# EAGLE board Qwiic-OpenLog_Panel (EAGLE 7.7.0), part 1 of 2
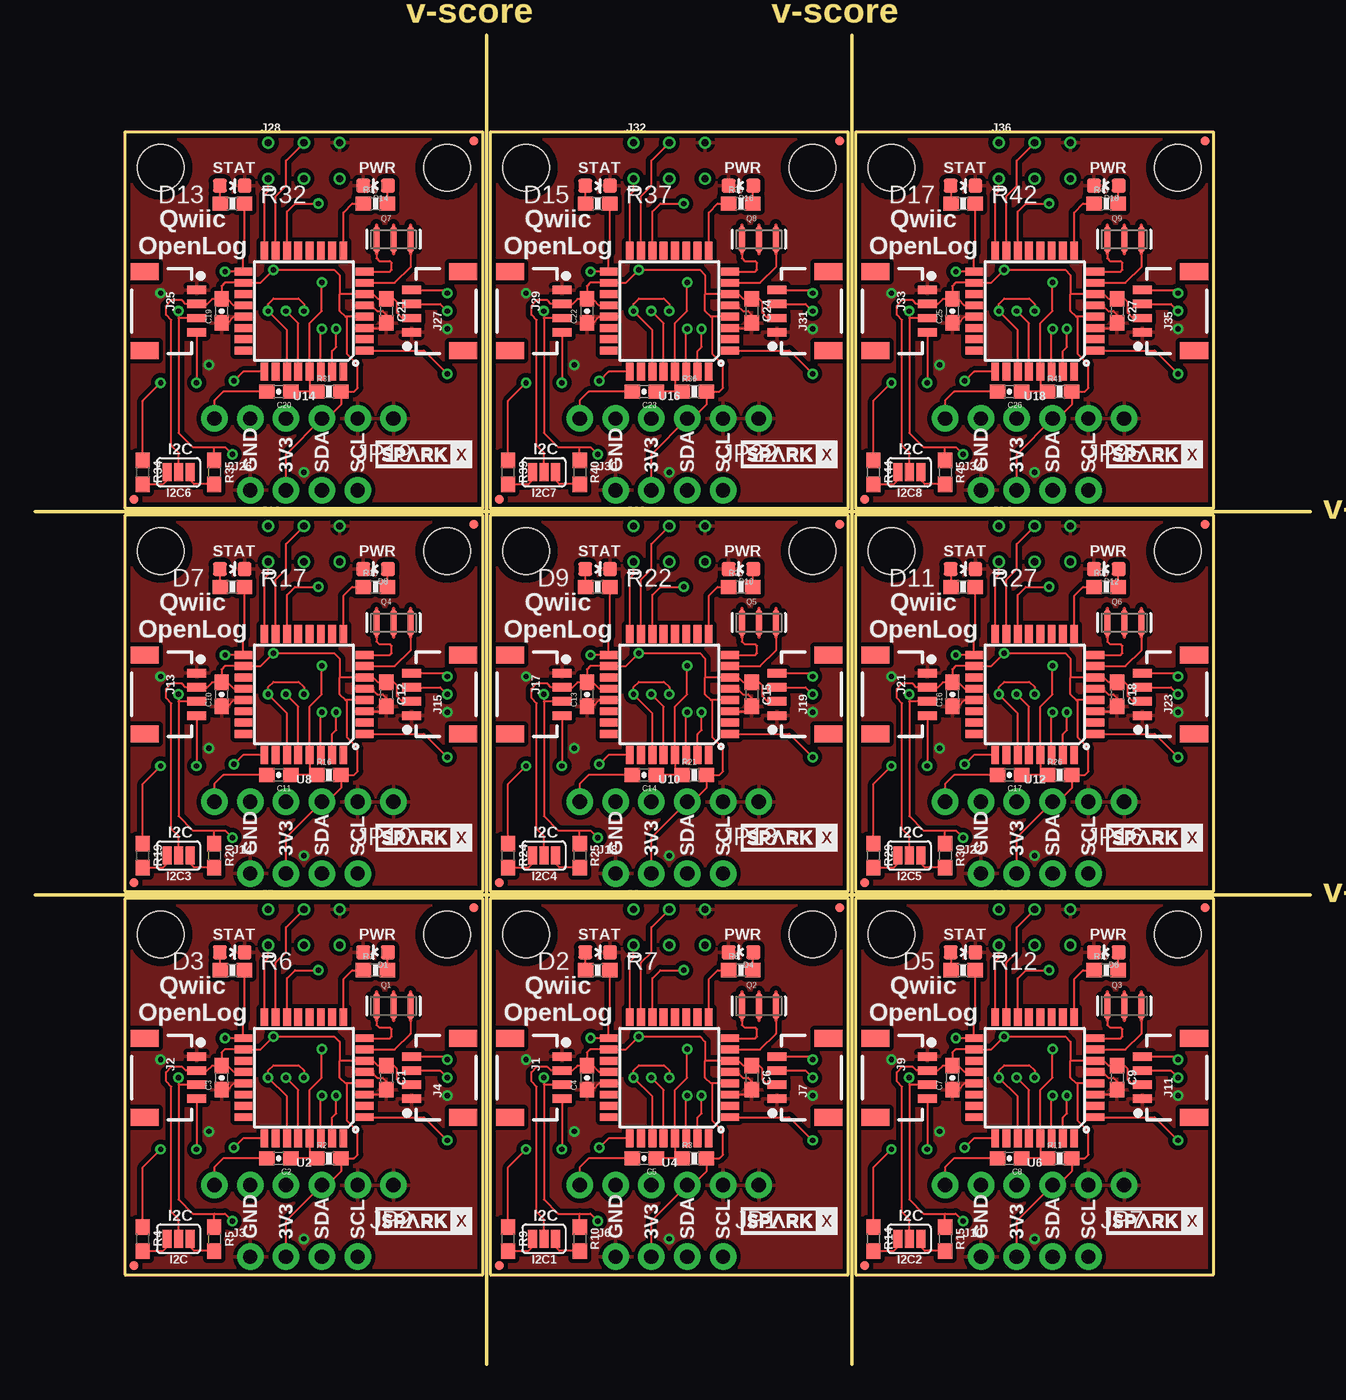
[diagram p0: board, top side]
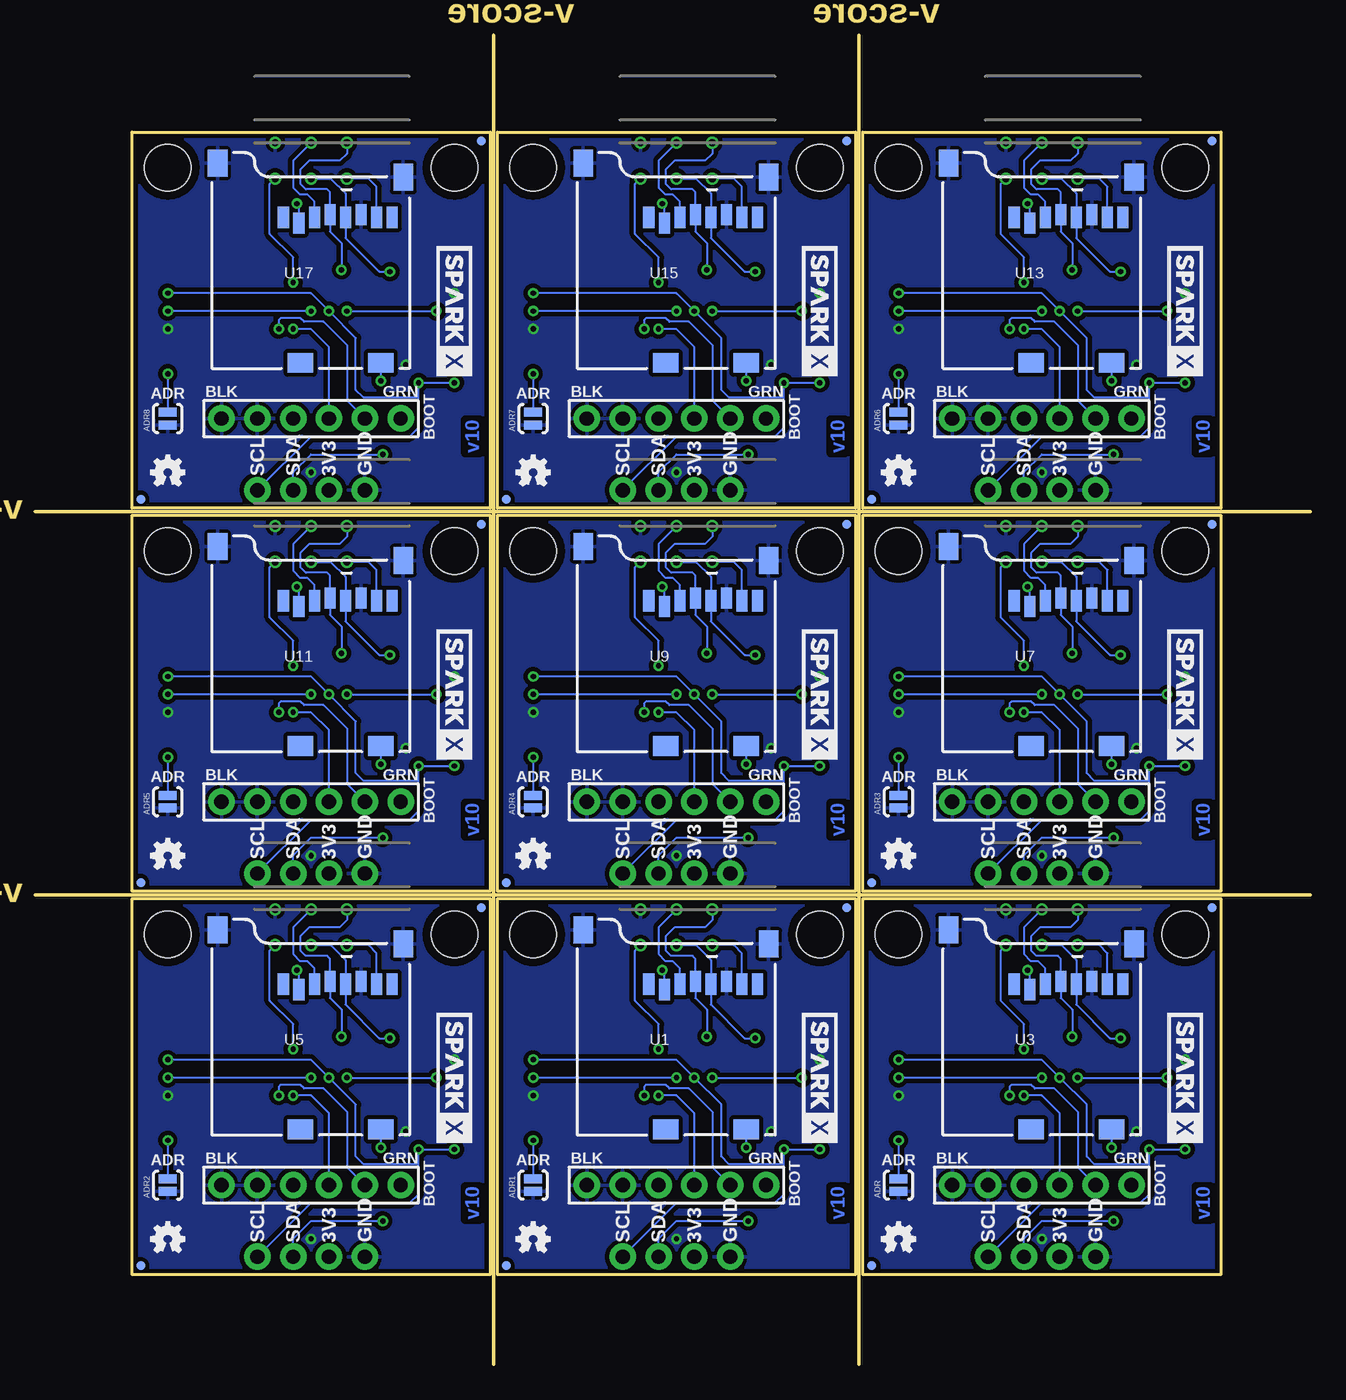
[diagram p1: board, bottom side, seen from below]

Size 90.42 x 94.23 mm. Coordinates in mm from the lower left corner, seen from the top.
Outline: 32,0 32,94.23
Outline: 57.91,0 57.91,94.23
Outline: 0,33.27 90.42,33.27
Outline: 0,60.45 90.42,60.45
Outline: 31.75,6.35 31.75,33.02 6.35,33.02 6.35,6.35 31.75,6.35
Outline: 57.66,6.35 57.66,33.02 32.26,33.02 32.26,6.35 57.66,6.35
Outline: 83.57,6.35 83.57,33.02 58.17,33.02 58.17,6.35 83.57,6.35
Outline: 31.75,33.53 31.75,60.2 6.35,60.2 6.35,33.53 31.75,33.53
Outline: 57.66,33.53 57.66,60.2 32.26,60.2 32.26,33.53 57.66,33.53
Outline: 83.57,33.53 83.57,60.2 58.17,60.2 58.17,33.53 83.57,33.53
Outline: 31.75,60.71 31.75,87.38 6.35,87.38 6.35,60.71 31.75,60.71
Outline: 57.66,60.71 57.66,87.38 32.26,87.38 32.26,60.71 57.66,60.71
Outline: 83.57,60.71 83.57,87.38 58.17,87.38 58.17,60.71 83.57,60.71
Copper layers (1*16): Top 0.035mm / dielectric 1.5mm / Bottom 0.035mm
Design rules "SparkFun-2-layer-PCBWay-LIMIT": minimum track width 6mil, minimum drill 0.3mm, track to track 6mil, track to pad 6mil, pad to pad 6mil, via to via 6mil, smd to smd 6mil, copper to edge 6mil, drill to drill 6mil, minimum pad ring 7mil, minimum via ring 7mil, stop-mask expansion 4mil, vias tented up to drill 25mil, thermal gap 10mil
Net classes: 1 vcc: width 0.152 mm

## Footprints (pad centres in the part's own frame; a part is rotated, then mirrored left to right if it is on the bottom)
SJ_2S-NO = smd 0.635 x 1.27: 1 -0.45,0; 2 0.45,0
0603 = smd 1.1 x 1: 1 -0.85,0; 2 0.85,0
0603-CAP = smd 1.1 x 1: 1 -0.85,0; 2 0.85,0
LED-0603 = smd 1 x 1: A 0,-0.877; C 0,0.877
MICRO-FIDUCIAL = smd 0.635 x 0.635: 1 0,0
SMT-JUMPER_3_2-NC_PASTE_SILK = smd 0.635 x 1.27: 1 -0.813,0; 2 0,0; 3 0.813,0
1X04_1MM_RA = smd 0.6 x 1.35: 1 -1.5,0; 2 -0.5,0; 3 0.5,0; 4 1.5,0 | smd 1.2 x 2: NC1 2.8,-3.675; NC2 -2.8,-3.675
1X04_NO_SILK = drill 1.016 pad 1.88: 1 0,0; 2 2.54,0; 3 5.08,0; 4 7.62,0
2X3_TEST_POINTS = drill 0.508: 1 -2.54,-1.27; 2 -2.54,1.27; 3 0,-1.27; 4 0,1.27; 5 2.54,-1.27; 6 2.54,1.27
1X06_NO_SILK = drill 1.016 pad 1.88: 1 0,0; 2 2.54,0; 3 5.08,0; 4 7.62,0; 5 10.16,0; 6 12.7,0
STAND-OFF = hole 3.302: 0,0
RESONATOR-SMD = smd 0.45 x 1.905: 1 -1.2,0; 2 0,0; 3 1.2,0
0603-RES = smd 1.1 x 1: 1 -0.85,0; 2 0.85,0
MICRO-SD-SOCKET-PP = smd 1.8 x 1.4: CD1 -2.05,0.4; CD2 -7.75,0.4 | smd 0.8 x 1.5: CS -7.84,10.3; DI -6.74,10.7; DO -2.34,10.7; GND -3.44,10.9; RSV1 -8.94,10.7; RSV2 -1.24,10.7; SCLK -4.54,10.7; VCC -5.64,10.9 | smd 1.4 x 1.9: GND1 -13.6,14.55; GND3 -0.45,13.55
TQFP32-08 = smd 1.27 x 0.559: 1 -4.293,2.8; 2 -4.293,2; 3 -4.293,1.2; 4 -4.293,0.4; 5 -4.293,-0.4; 6 -4.293,-1.2; 7 -4.293,-2; 8 -4.293,-2.8; 17 4.293,-2.8; 18 4.293,-2; 19 4.293,-1.2; 20 4.293,-0.4; 21 4.293,0.4; 22 4.293,1.2; 23 4.293,2; 24 4.293,2.8 | smd 0.559 x 1.27: 9 -2.8,-4.293; 10 -2,-4.293; 11 -1.2,-4.293; 12 -0.4,-4.293; 13 0.4,-4.293; 14 1.2,-4.293; 15 2,-4.293; 16 2.8,-4.293; 25 2.8,4.293; 26 2,4.293; 27 1.2,4.293; 28 0.4,4.293; 29 -0.4,4.293; 30 -1.2,4.293; 31 -2,4.293; 32 -2.8,4.293

## Placement (x,y rotation side)
ADR  [SJ_2S-NO]  29.21,12.7 90 bottom
ADR1  [SJ_2S-NO]  55.12,12.7 90 bottom
ADR2  [SJ_2S-NO]  81.03,12.7 90 bottom
ADR3  [SJ_2S-NO]  29.21,39.88 90 bottom
ADR4  [SJ_2S-NO]  55.12,39.88 90 bottom
ADR5  [SJ_2S-NO]  81.03,39.88 90 bottom
ADR6  [SJ_2S-NO]  29.21,67.06 90 bottom
ADR7  [SJ_2S-NO]  55.12,67.06 90 bottom
ADR8  [SJ_2S-NO]  81.03,67.06 90 bottom
C1  4.7uF  [0603]  24.89,20.32 270 top
C2  0.1uF  [0603-CAP]  17.27,14.61 180 top
C3  0.1uF  [0603-CAP]  13.21,20.32 90 top
C4  0.1uF  [0603-CAP]  39.12,20.32 90 top
C5  0.1uF  [0603-CAP]  43.18,14.61 180 top
C6  4.7uF  [0603]  50.8,20.32 270 top
C7  0.1uF  [0603-CAP]  65.02,20.32 90 top
C8  0.1uF  [0603-CAP]  69.09,14.61 180 top
C9  4.7uF  [0603]  76.71,20.32 270 top
C10  0.1uF  [0603-CAP]  13.21,47.5 90 top
C11  0.1uF  [0603-CAP]  17.27,41.78 180 top
C12  4.7uF  [0603]  24.89,47.5 270 top
C13  0.1uF  [0603-CAP]  39.12,47.5 90 top
C14  0.1uF  [0603-CAP]  43.18,41.78 180 top
C15  4.7uF  [0603]  50.8,47.5 270 top
C16  0.1uF  [0603-CAP]  65.02,47.5 90 top
C17  0.1uF  [0603-CAP]  69.09,41.78 180 top
C18  4.7uF  [0603]  76.71,47.5 270 top
C19  0.1uF  [0603-CAP]  13.21,74.68 90 top
C20  0.1uF  [0603-CAP]  17.27,68.96 180 top
C21  4.7uF  [0603]  24.89,74.68 270 top
C22  0.1uF  [0603-CAP]  39.12,74.68 90 top
C23  0.1uF  [0603-CAP]  43.18,68.96 180 top
C24  4.7uF  [0603]  50.8,74.68 270 top
C25  0.1uF  [0603-CAP]  65.02,74.68 90 top
C26  0.1uF  [0603-CAP]  69.09,68.96 180 top
C27  4.7uF  [0603]  76.71,74.68 270 top
D1  RED  [LED-0603]  24.13,29.21 90 top
D2  GREEN  [LED-0603]  39.88,29.21 270 top
D3  GREEN  [LED-0603]  13.97,29.21 270 top
D4  RED  [LED-0603]  50.04,29.21 90 top
D5  GREEN  [LED-0603]  65.79,29.21 270 top
D6  RED  [LED-0603]  75.95,29.21 90 top
D7  GREEN  [LED-0603]  13.97,56.39 270 top
D8  RED  [LED-0603]  24.13,56.39 90 top
D9  GREEN  [LED-0603]  39.88,56.39 270 top
D10  RED  [LED-0603]  50.04,56.39 90 top
D11  GREEN  [LED-0603]  65.79,56.39 270 top
D12  RED  [LED-0603]  75.95,56.39 90 top
D13  GREEN  [LED-0603]  13.97,83.57 270 top
D14  RED  [LED-0603]  24.13,83.57 90 top
D15  GREEN  [LED-0603]  39.88,83.57 270 top
D16  RED  [LED-0603]  50.04,83.57 90 top
D17  GREEN  [LED-0603]  65.79,83.57 270 top
D18  RED  [LED-0603]  75.95,83.57 90 top
FID1  FIDUCIALUFIDUCIAL  [MICRO-FIDUCIAL]  31.12,32.38 0 top
FID2  FIDUCIALUFIDUCIAL  [MICRO-FIDUCIAL]  6.98,6.98 0 top
FID3  FIDUCIALUFIDUCIAL  [MICRO-FIDUCIAL]  31.12,6.98 180 bottom
FID4  FIDUCIALUFIDUCIAL  [MICRO-FIDUCIAL]  6.98,32.38 0 bottom
FID5  FIDUCIALUFIDUCIAL  [MICRO-FIDUCIAL]  57.02,32.38 0 top
FID6  FIDUCIALUFIDUCIAL  [MICRO-FIDUCIAL]  32.89,6.98 0 top
FID7  FIDUCIALUFIDUCIAL  [MICRO-FIDUCIAL]  57.02,6.98 180 bottom
FID8  FIDUCIALUFIDUCIAL  [MICRO-FIDUCIAL]  32.89,32.38 0 bottom
FID9  FIDUCIALUFIDUCIAL  [MICRO-FIDUCIAL]  82.93,32.38 0 top
FID10  FIDUCIALUFIDUCIAL  [MICRO-FIDUCIAL]  58.8,6.98 0 top
FID11  FIDUCIALUFIDUCIAL  [MICRO-FIDUCIAL]  82.93,6.98 180 bottom
FID12  FIDUCIALUFIDUCIAL  [MICRO-FIDUCIAL]  58.8,32.38 0 bottom
FID13  FIDUCIALUFIDUCIAL  [MICRO-FIDUCIAL]  31.12,59.56 0 top
FID14  FIDUCIALUFIDUCIAL  [MICRO-FIDUCIAL]  6.98,34.16 0 top
FID15  FIDUCIALUFIDUCIAL  [MICRO-FIDUCIAL]  31.12,34.16 180 bottom
FID16  FIDUCIALUFIDUCIAL  [MICRO-FIDUCIAL]  6.98,59.56 0 bottom
FID17  FIDUCIALUFIDUCIAL  [MICRO-FIDUCIAL]  57.02,59.56 0 top
FID18  FIDUCIALUFIDUCIAL  [MICRO-FIDUCIAL]  32.89,34.16 0 top
FID19  FIDUCIALUFIDUCIAL  [MICRO-FIDUCIAL]  57.02,34.16 180 bottom
FID20  FIDUCIALUFIDUCIAL  [MICRO-FIDUCIAL]  32.89,59.56 0 bottom
FID21  FIDUCIALUFIDUCIAL  [MICRO-FIDUCIAL]  82.93,59.56 0 top
FID22  FIDUCIALUFIDUCIAL  [MICRO-FIDUCIAL]  58.8,34.16 0 top
FID23  FIDUCIALUFIDUCIAL  [MICRO-FIDUCIAL]  82.93,34.16 180 bottom
FID24  FIDUCIALUFIDUCIAL  [MICRO-FIDUCIAL]  58.8,59.56 0 bottom
FID25  FIDUCIALUFIDUCIAL  [MICRO-FIDUCIAL]  31.12,86.74 0 top
FID26  FIDUCIALUFIDUCIAL  [MICRO-FIDUCIAL]  6.98,61.34 0 top
FID27  FIDUCIALUFIDUCIAL  [MICRO-FIDUCIAL]  31.12,61.34 180 bottom
FID28  FIDUCIALUFIDUCIAL  [MICRO-FIDUCIAL]  6.98,86.74 0 bottom
FID29  FIDUCIALUFIDUCIAL  [MICRO-FIDUCIAL]  57.02,86.74 0 top
FID30  FIDUCIALUFIDUCIAL  [MICRO-FIDUCIAL]  32.89,61.34 0 top
FID31  FIDUCIALUFIDUCIAL  [MICRO-FIDUCIAL]  57.02,61.34 180 bottom
FID32  FIDUCIALUFIDUCIAL  [MICRO-FIDUCIAL]  32.89,86.74 0 bottom
FID33  FIDUCIALUFIDUCIAL  [MICRO-FIDUCIAL]  82.93,86.74 0 top
FID34  FIDUCIALUFIDUCIAL  [MICRO-FIDUCIAL]  58.8,61.34 0 top
FID35  FIDUCIALUFIDUCIAL  [MICRO-FIDUCIAL]  82.93,61.34 180 bottom
FID36  FIDUCIALUFIDUCIAL  [MICRO-FIDUCIAL]  58.8,86.74 0 bottom
I2C  [SMT-JUMPER_3_2-NC_PASTE_SILK]  10.16,8.89 180 top
I2C1  [SMT-JUMPER_3_2-NC_PASTE_SILK]  36.07,8.89 180 top
I2C2  [SMT-JUMPER_3_2-NC_PASTE_SILK]  61.98,8.89 180 top
I2C3  [SMT-JUMPER_3_2-NC_PASTE_SILK]  10.16,36.07 180 top
I2C4  [SMT-JUMPER_3_2-NC_PASTE_SILK]  36.07,36.07 180 top
I2C5  [SMT-JUMPER_3_2-NC_PASTE_SILK]  61.98,36.07 180 top
I2C6  [SMT-JUMPER_3_2-NC_PASTE_SILK]  10.16,63.25 180 top
I2C7  [SMT-JUMPER_3_2-NC_PASTE_SILK]  36.07,63.25 180 top
I2C8  [SMT-JUMPER_3_2-NC_PASTE_SILK]  61.98,63.25 180 top
J1  SMD  [1X04_1MM_RA]  37.34,20.32 270 top
J2  SMD  [1X04_1MM_RA]  11.43,20.32 270 top
J3  PTH  [1X04_NO_SILK]  15.24,7.62 0 top
J4  SMD  [1X04_1MM_RA]  26.67,20.32 90 top
J5  ISP  [2X3_TEST_POINTS]  19.05,30.99 0 top
J6  PTH  [1X04_NO_SILK]  41.15,7.62 0 top
J7  SMD  [1X04_1MM_RA]  52.58,20.32 90 top
J8  ISP  [2X3_TEST_POINTS]  44.96,30.99 0 top
J9  SMD  [1X04_1MM_RA]  63.25,20.32 270 top
J10  PTH  [1X04_NO_SILK]  67.06,7.62 0 top
J11  SMD  [1X04_1MM_RA]  78.49,20.32 90 top
J12  ISP  [2X3_TEST_POINTS]  70.87,30.99 0 top
J13  SMD  [1X04_1MM_RA]  11.43,47.5 270 top
J14  PTH  [1X04_NO_SILK]  15.24,34.8 0 top
J15  SMD  [1X04_1MM_RA]  26.67,47.5 90 top
J16  ISP  [2X3_TEST_POINTS]  19.05,58.17 0 top
J17  SMD  [1X04_1MM_RA]  37.34,47.5 270 top
J18  PTH  [1X04_NO_SILK]  41.15,34.8 0 top
J19  SMD  [1X04_1MM_RA]  52.58,47.5 90 top
J20  ISP  [2X3_TEST_POINTS]  44.96,58.17 0 top
J21  SMD  [1X04_1MM_RA]  63.25,47.5 270 top
J22  PTH  [1X04_NO_SILK]  67.06,34.8 0 top
J23  SMD  [1X04_1MM_RA]  78.49,47.5 90 top
J24  ISP  [2X3_TEST_POINTS]  70.87,58.17 0 top
J25  SMD  [1X04_1MM_RA]  11.43,74.68 270 top
J26  PTH  [1X04_NO_SILK]  15.24,61.98 0 top
J27  SMD  [1X04_1MM_RA]  26.67,74.68 90 top
J28  ISP  [2X3_TEST_POINTS]  19.05,85.34 0 top
J29  SMD  [1X04_1MM_RA]  37.34,74.68 270 top
J30  PTH  [1X04_NO_SILK]  41.15,61.98 0 top
J31  SMD  [1X04_1MM_RA]  52.58,74.68 90 top
J32  ISP  [2X3_TEST_POINTS]  44.96,85.34 0 top
J33  SMD  [1X04_1MM_RA]  63.25,74.68 270 top
J34  PTH  [1X04_NO_SILK]  67.06,61.98 0 top
J35  SMD  [1X04_1MM_RA]  78.49,74.68 90 top
J36  ISP  [2X3_TEST_POINTS]  70.87,85.34 0 top
JP1  BOOT  [1X06_NO_SILK]  51.31,12.7 180 top
JP2  BOOT  [1X06_NO_SILK]  25.4,12.7 180 top
JP3  STAND-OFF  [STAND-OFF]  8.89,30.48 0 top
JP4  STAND-OFF  [STAND-OFF]  29.21,30.48 0 top
JP5  STAND-OFF  [STAND-OFF]  34.8,30.48 0 top
JP6  STAND-OFF  [STAND-OFF]  55.12,30.48 0 top
JP7  BOOT  [1X06_NO_SILK]  77.22,12.7 180 top
JP8  STAND-OFF  [STAND-OFF]  60.71,30.48 0 top
JP9  STAND-OFF  [STAND-OFF]  81.03,30.48 0 top
JP10  BOOT  [1X06_NO_SILK]  25.4,39.88 180 top
JP11  STAND-OFF  [STAND-OFF]  8.89,57.66 0 top
JP12  STAND-OFF  [STAND-OFF]  29.21,57.66 0 top
JP13  BOOT  [1X06_NO_SILK]  51.31,39.88 180 top
JP14  STAND-OFF  [STAND-OFF]  34.8,57.66 0 top
JP15  STAND-OFF  [STAND-OFF]  55.12,57.66 0 top
JP16  BOOT  [1X06_NO_SILK]  77.22,39.88 180 top
JP17  STAND-OFF  [STAND-OFF]  60.71,57.66 0 top
JP18  STAND-OFF  [STAND-OFF]  81.03,57.66 0 top
JP19  BOOT  [1X06_NO_SILK]  25.4,67.06 180 top
JP20  STAND-OFF  [STAND-OFF]  8.89,84.84 0 top
JP21  STAND-OFF  [STAND-OFF]  29.21,84.84 0 top
JP22  BOOT  [1X06_NO_SILK]  51.31,67.06 180 top
JP23  STAND-OFF  [STAND-OFF]  34.8,84.84 0 top
JP24  STAND-OFF  [STAND-OFF]  55.12,84.84 0 top
JP25  BOOT  [1X06_NO_SILK]  77.22,67.06 180 top
JP26  STAND-OFF  [STAND-OFF]  60.71,84.84 0 top
JP27  STAND-OFF  [STAND-OFF]  81.03,84.84 0 top
LOGO1  OSHW-LOGOMINI  [OSHW-LOGO-MINI]  55.12,8.89 0 bottom
LOGO2  OSHW-LOGOMINI  [OSHW-LOGO-MINI]  29.21,8.89 0 bottom
LOGO3  OSHW-LOGOMINI  [OSHW-LOGO-MINI]  81.03,8.89 0 bottom
LOGO4  OSHW-LOGOMINI  [OSHW-LOGO-MINI]  29.21,36.07 0 bottom
LOGO5  OSHW-LOGOMINI  [OSHW-LOGO-MINI]  55.12,36.07 0 bottom
LOGO6  OSHW-LOGOMINI  [OSHW-LOGO-MINI]  81.03,36.07 0 bottom
LOGO7  OSHW-LOGOMINI  [OSHW-LOGO-MINI]  29.21,63.25 0 bottom
LOGO8  OSHW-LOGOMINI  [OSHW-LOGO-MINI]  55.12,63.25 0 bottom
LOGO9  OSHW-LOGOMINI  [OSHW-LOGO-MINI]  81.03,63.25 0 bottom
Q1  16MHZ  [RESONATOR-SMD]  25.4,25.4 0 top
Q2  16MHZ  [RESONATOR-SMD]  51.31,25.4 0 top
Q3  16MHZ  [RESONATOR-SMD]  77.22,25.4 0 top
Q4  16MHZ  [RESONATOR-SMD]  25.4,52.58 0 top
Q5  16MHZ  [RESONATOR-SMD]  51.31,52.58 0 top
Q6  16MHZ  [RESONATOR-SMD]  77.22,52.58 0 top
Q7  16MHZ  [RESONATOR-SMD]  25.4,79.76 0 top
Q8  16MHZ  [RESONATOR-SMD]  51.31,79.76 0 top
Q9  16MHZ  [RESONATOR-SMD]  77.22,79.76 0 top
R1  1K  [0603-RES]  24.13,27.94 0 top
R2  10K  [0603-RES]  20.83,14.61 0 top
R3  10K  [0603-RES]  46.74,14.61 0 top
R4  2.2k  [0603]  7.62,8.89 270 top
R5  2.2k  [0603]  12.7,8.89 270 top
R6  330  [0603-RES]  13.97,27.94 180 top
R7  330  [0603-RES]  39.88,27.94 180 top
R8  1K  [0603-RES]  50.04,27.94 0 top
R9  2.2k  [0603]  33.53,8.89 270 top
R10  2.2k  [0603]  38.61,8.89 270 top
R11  10K  [0603-RES]  72.64,14.61 0 top
R12  330  [0603-RES]  65.79,27.94 180 top
R13  1K  [0603-RES]  75.95,27.94 0 top
R14  2.2k  [0603]  59.44,8.89 270 top
R15  2.2k  [0603]  64.52,8.89 270 top
R16  10K  [0603-RES]  20.83,41.78 0 top
R17  330  [0603-RES]  13.97,55.12 180 top
R18  1K  [0603-RES]  24.13,55.12 0 top
R19  2.2k  [0603]  7.62,36.07 270 top
R20  2.2k  [0603]  12.7,36.07 270 top
R21  10K  [0603-RES]  46.74,41.78 0 top
R22  330  [0603-RES]  39.88,55.12 180 top
R23  1K  [0603-RES]  50.04,55.12 0 top
R24  2.2k  [0603]  33.53,36.07 270 top
R25  2.2k  [0603]  38.61,36.07 270 top
R26  10K  [0603-RES]  72.64,41.78 0 top
R27  330  [0603-RES]  65.79,55.12 180 top
R28  1K  [0603-RES]  75.95,55.12 0 top
R29  2.2k  [0603]  59.44,36.07 270 top
R30  2.2k  [0603]  64.52,36.07 270 top
R31  10K  [0603-RES]  20.83,68.96 0 top
R32  330  [0603-RES]  13.97,82.3 180 top
R33  1K  [0603-RES]  24.13,82.3 0 top
R34  2.2k  [0603]  7.62,63.25 270 top
R35  2.2k  [0603]  12.7,63.25 270 top
R36  10K  [0603-RES]  46.74,68.96 0 top
R37  330  [0603-RES]  39.88,82.3 180 top
R38  1K  [0603-RES]  50.04,82.3 0 top
R39  2.2k  [0603]  33.53,63.25 270 top
R40  2.2k  [0603]  38.61,63.25 270 top
R41  10K  [0603-RES]  72.64,68.96 0 top
R42  330  [0603-RES]  65.79,82.3 180 top
R43  1K  [0603-RES]  75.95,82.3 0 top
R44  2.2k  [0603]  59.44,63.25 270 top
R45  2.2k  [0603]  64.52,63.25 270 top
U1  microSD Socket  [MICRO-SD-SOCKET-PP]  37.97,16.26 0 bottom
U2  ATMEGA328P_TQFP  [TQFP32-08]  19.05,20.32 180 top
U3  microSD Socket  [MICRO-SD-SOCKET-PP]  12.06,16.26 0 bottom
U4  ATMEGA328P_TQFP  [TQFP32-08]  44.96,20.32 180 top
U5  microSD Socket  [MICRO-SD-SOCKET-PP]  63.88,16.26 0 bottom
U6  ATMEGA328P_TQFP  [TQFP32-08]  70.87,20.32 180 top
U7  microSD Socket  [MICRO-SD-SOCKET-PP]  12.06,43.43 0 bottom
U8  ATMEGA328P_TQFP  [TQFP32-08]  19.05,47.5 180 top
U9  microSD Socket  [MICRO-SD-SOCKET-PP]  37.97,43.43 0 bottom
U10  ATMEGA328P_TQFP  [TQFP32-08]  44.96,47.5 180 top
U11  microSD Socket  [MICRO-SD-SOCKET-PP]  63.88,43.43 0 bottom
U12  ATMEGA328P_TQFP  [TQFP32-08]  70.87,47.5 180 top
U13  microSD Socket  [MICRO-SD-SOCKET-PP]  12.06,70.61 0 bottom
U14  ATMEGA328P_TQFP  [TQFP32-08]  19.05,74.68 180 top
U15  microSD Socket  [MICRO-SD-SOCKET-PP]  37.97,70.61 0 bottom
U16  ATMEGA328P_TQFP  [TQFP32-08]  44.96,74.68 180 top
U17  microSD Socket  [MICRO-SD-SOCKET-PP]  63.88,70.61 0 bottom
U18  ATMEGA328P_TQFP  [TQFP32-08]  70.87,74.68 180 top
U$1  SPARKX-LOGO4  [SPARKX-MEDIUM]  8.89,20.32 270 bottom
U$2  SPARKX-LOGO3  [SPARKX-SMALL]  27.56,10.16 0 top
U$3  SPARKX-LOGO3  [SPARKX-SMALL]  53.47,10.16 0 top
U$4  SPARKX-LOGO4  [SPARKX-MEDIUM]  34.8,20.32 270 bottom
U$5  SPARKX-LOGO3  [SPARKX-SMALL]  79.38,10.16 0 top
U$6  SPARKX-LOGO4  [SPARKX-MEDIUM]  60.71,20.32 270 bottom
U$7  SPARKX-LOGO3  [SPARKX-SMALL]  27.56,37.34 0 top
U$8  SPARKX-LOGO4  [SPARKX-MEDIUM]  8.89,47.5 270 bottom
U$9  SPARKX-LOGO3  [SPARKX-SMALL]  53.47,37.34 0 top
U$10  SPARKX-LOGO4  [SPARKX-MEDIUM]  34.8,47.5 270 bottom
U$11  SPARKX-LOGO3  [SPARKX-SMALL]  79.38,37.34 0 top
U$12  SPARKX-LOGO4  [SPARKX-MEDIUM]  60.71,47.5 270 bottom
U$13  SPARKX-LOGO3  [SPARKX-SMALL]  27.56,64.52 0 top
U$14  SPARKX-LOGO4  [SPARKX-MEDIUM]  8.89,74.68 270 bottom
U$15  SPARKX-LOGO3  [SPARKX-SMALL]  53.47,64.52 0 top
U$16  SPARKX-LOGO4  [SPARKX-MEDIUM]  34.8,74.68 270 bottom
U$17  SPARKX-LOGO3  [SPARKX-SMALL]  79.38,64.52 0 top
U$18  SPARKX-LOGO4  [SPARKX-MEDIUM]  60.71,74.68 270 bottom

## Library data of the parts
ADR ADR1-ADR8 JP3-JP6 JP8 JP9 JP11 JP12 JP14 JP15 JP17 JP18 JP20 JP21 JP23 JP24 JP26 JP27 = SparkFun
C1 C6 C9 C12 C15 C18 C21 C24 C27 = SparkFun-Capacitors; PROD_ID: CAP-08280
C2-C5 C7 C8 C10 C11 C13 C14 C16 C17 C19 C20 C22 C23 C25 C26 = SparkFun-Capacitors; PROD_ID: CAP-00810
D1 D4 D6 D8 D10 D12 D14 D16 D18 = SparkFun-LED; PROD_ID: DIO-08575; VALUE: BLUE
D2 D3 D5 D7 D9 D11 D13 D15 D17 = SparkFun-LED; PROD_ID: DIO-00821
FID1-FID36 LOGO1-LOGO9 = SparkFun-Aesthetics
I2C I2C1-I2C8 = SparkFun-Jumpers
J1-J4 J6 J7 J9-J11 J13-J15 J17-J19 J21-J23 J25-J27 J29-J31 J33-J35 U$1-U$18 = SparkX
J5 J8 J12 J16 J20 J24 J28 J32 J36 = SparkFun-Connectors
JP1 JP2 JP7 JP10 JP13 JP16 JP19 JP22 JP25 = SparkFun-Connectors; PROD_ID: CONN-08437
Q1-Q9 = SparkFun-FreqCtrl; PROD_ID: XTAL-08900
R1 R8 R13 R18 R23 R28 R33 R38 R43 = SparkFun-Resistors; PROD_ID: RES-07856
R2 R3 R11 R16 R21 R26 R31 R36 R41 = SparkFun-Resistors; PROD_ID: RES-00824
R4 R5 R9 R10 R14 R15 R19 R20 R24 R25 R29 R30 R34 R35 R39 R40 R44 R45 = SparkFun-Resistors; PROD_ID: RES-08272
R6 R7 R12 R17 R22 R27 R32 R37 R42 = SparkFun-Resistors; PROD_ID: RES-00818
U1 U3 U5 U7 U9 U11 U13 U15 U17 = SparkFun-Connectors; PROD_ID: CONN-07820
U2 U4 U6 U8 U10 U12 U14 U16 U18 = SparkFun-IC-Microcontroller; PROD_ID: IC-09069

## Nets
3.3V: C1.1 C3.2 I2C.2 J2.2 J3.2 J4.2 J5.2 JP2.3 R2.2 U2.4 U2.6 U2.18 U2.20 U3.VCC
3.3V1: C4.2 C6.1 I2C1.2 J1.2 J6.2 J7.2 J8.2 JP1.3 R3.2 U1.VCC U4.4 U4.6 U4.18 U4.20
3.3V2: C7.2 C9.1 I2C2.2 J9.2 J10.2 J11.2 J12.2 JP7.3 R11.2 U5.VCC U6.4 U6.6 U6.18 U6.20
3.3V3: C10.2 C12.1 I2C3.2 J13.2 J14.2 J15.2 J16.2 JP10.3 R16.2 U7.VCC U8.4 U8.6 U8.18 U8.20
3.3V4: C13.2 C15.1 I2C4.2 J17.2 J18.2 J19.2 J20.2 JP13.3 R21.2 U9.VCC U10.4 U10.6 U10.18 U10.20
3.3V5: C16.2 C18.1 I2C5.2 J21.2 J22.2 J23.2 J24.2 JP16.3 R26.2 U11.VCC U12.4 U12.6 U12.18 U12.20
3.3V6: C19.2 C21.1 I2C6.2 J25.2 J26.2 J27.2 J28.2 JP19.3 R31.2 U13.VCC U14.4 U14.6 U14.18 U14.20
3.3V7: C22.2 C24.1 I2C7.2 J29.2 J30.2 J31.2 J32.2 JP22.3 R36.2 U15.VCC U16.4 U16.6 U16.18 U16.20
3.3V8: C25.2 C27.1 I2C8.2 J33.2 J34.2 J35.2 J36.2 JP25.3 R41.2 U17.VCC U18.4 U18.6 U18.18 U18.20
ADDR: ADR.2 U2.1
ADDR1: ADR1.2 U4.1
ADDR2: ADR2.2 U6.1
ADDR3: ADR3.2 U8.1
ADDR4: ADR4.2 U10.1
ADDR5: ADR5.2 U12.1
ADDR6: ADR6.2 U14.1
ADDR7: ADR7.2 U16.1
ADDR8: ADR8.2 U18.1
CD: U2.25 U3.CD1
CD1: U1.CD1 U4.25
CD2: U5.CD1 U6.25
CD3: U7.CD1 U8.25
CD4: U9.CD1 U10.25
CD5: U11.CD1 U12.25
CD6: U13.CD1 U14.25
CD7: U15.CD1 U16.25
CD8: U17.CD1 U18.25
CS: U2.14 U3.CS
CS1: U1.CS U4.14
CS2: U5.CS U6.14
CS3: U7.CS U8.14
CS4: U9.CS U10.14
CS5: U11.CS U12.14
CS6: U13.CS U14.14
CS7: U15.CS U16.14
CS8: U17.CS U18.14
DTR: C2.2 JP2.6
DTR1: C5.2 JP1.6
DTR2: C8.2 JP7.6
DTR3: C11.2 JP10.6
DTR4: C14.2 JP13.6
DTR5: C17.2 JP16.6
DTR6: C20.2 JP19.6
DTR7: C23.2 JP22.6
DTR8: C26.2 JP25.6
GND [vcc]: ADR.1 C1.2 C3.1 D1.C D3.C J2.1 J3.1 J4.1 J5.6 JP2.1 JP2.2 Q1.2 U2.3 U2.5 U2.21 U3.GND U3.GND1 U3.GND3
GND1 [vcc]: ADR1.1 C4.1 C6.2 D2.C D4.C J1.1 J6.1 J7.1 J8.6 JP1.1 JP1.2 Q2.2 U1.GND U1.GND1 U1.GND3 U4.3 U4.5 U4.21
GND2 [vcc]: ADR2.1 C7.1 C9.2 D5.C D6.C J9.1 J10.1 J11.1 J12.6 JP7.1 JP7.2 Q3.2 U5.GND U5.GND1 U5.GND3 U6.3 U6.5 U6.21
GND3 [vcc]: ADR3.1 C10.1 C12.2 D7.C D8.C J13.1 J14.1 J15.1 J16.6 JP10.1 JP10.2 Q4.2 U7.GND U7.GND1 U7.GND3 U8.3 U8.5 U8.21
GND4 [vcc]: ADR4.1 C13.1 C15.2 D9.C D10.C J17.1 J18.1 J19.1 J20.6 JP13.1 JP13.2 Q5.2 U9.GND U9.GND1 U9.GND3 U10.3 U10.5 U10.21
GND5 [vcc]: ADR5.1 C16.1 C18.2 D11.C D12.C J21.1 J22.1 J23.1 J24.6 JP16.1 JP16.2 Q6.2 U11.GND U11.GND1 U11.GND3 U12.3 U12.5 U12.21
GND6 [vcc]: ADR6.1 C19.1 C21.2 D13.C D14.C J25.1 J26.1 J27.1 J28.6 JP19.1 JP19.2 Q7.2 U13.GND U13.GND1 U13.GND3 U14.3 U14.5 U14.21
GND7 [vcc]: ADR7.1 C22.1 C24.2 D15.C D16.C J29.1 J30.1 J31.1 J32.6 JP22.1 JP22.2 Q8.2 U15.GND U15.GND1 U15.GND3 U16.3 U16.5 U16.21
GND8 [vcc]: ADR8.1 C25.1 C27.2 D17.C D18.C J33.1 J34.1 J35.1 J36.6 JP25.1 JP25.2 Q9.2 U17.GND U17.GND1 U17.GND3 U18.3 U18.5 U18.21
MISO: J5.1 U2.16 U3.DO
MISO1: J8.1 U1.DO U4.16
MISO2: J12.1 U5.DO U6.16
MISO3: J16.1 U7.DO U8.16
MISO4: J20.1 U9.DO U10.16
MISO5: J24.1 U11.DO U12.16
MISO6: J28.1 U13.DO U14.16
MISO7: J32.1 U15.DO U16.16
MISO8: J36.1 U17.DO U18.16
MOSI: J5.4 U2.15 U3.DI
MOSI1: J8.4 U1.DI U4.15
MOSI2: J12.4 U5.DI U6.15
MOSI3: J16.4 U7.DI U8.15
MOSI4: J20.4 U9.DI U10.15
MOSI5: J24.4 U11.DI U12.15
MOSI6: J28.4 U13.DI U14.15
MOSI7: J32.4 U15.DI U16.15
MOSI8: J36.4 U17.DI U18.15
N$1: Q1.1 U2.8
N$2: Q1.3 U2.7
N$3: D1.A R1.2
N$4: R1.1 U2.9
N$5: I2C.1 R5.2
N$6: I2C.3 R4.2
N$7: D3.A R6.2
N$8: D2.A R7.2
N$9: Q2.1 U4.8
N$10: Q2.3 U4.7
N$11: D4.A R8.2
N$12: R8.1 U4.9
N$13: I2C1.1 R10.2
N$14: I2C1.3 R9.2
N$15: D5.A R12.2
N$16: Q3.1 U6.8
N$17: Q3.3 U6.7
N$18: D6.A R13.2
N$19: R13.1 U6.9
N$20: I2C2.1 R15.2
N$21: I2C2.3 R14.2
N$22: D7.A R17.2
N$23: Q4.1 U8.8
N$24: Q4.3 U8.7
N$25: D8.A R18.2
N$26: R18.1 U8.9
N$27: I2C3.1 R20.2
N$28: I2C3.3 R19.2
N$29: D9.A R22.2
N$30: Q5.1 U10.8
N$31: Q5.3 U10.7
N$32: D10.A R23.2
N$33: R23.1 U10.9
N$34: I2C4.1 R25.2
N$35: I2C4.3 R24.2
N$36: D11.A R27.2
N$37: Q6.1 U12.8
N$38: Q6.3 U12.7
N$39: D12.A R28.2
N$40: R28.1 U12.9
N$41: I2C5.1 R30.2
N$42: I2C5.3 R29.2
N$43: D13.A R32.2
N$44: Q7.1 U14.8
N$45: Q7.3 U14.7
N$46: D14.A R33.2
N$47: R33.1 U14.9
N$48: I2C6.1 R35.2
N$49: I2C6.3 R34.2
N$50: D15.A R37.2
N$51: Q8.1 U16.8
N$52: Q8.3 U16.7
N$53: D16.A R38.2
N$54: R38.1 U16.9
N$55: I2C7.1 R40.2
N$56: I2C7.3 R39.2
N$57: D17.A R42.2
N$58: Q9.1 U18.8
N$59: Q9.3 U18.7
N$60: D18.A R43.2
N$61: R43.1 U18.9
N$62: I2C8.1 R45.2
N$63: I2C8.3 R44.2
RST: C2.1 J5.5 R2.1 U2.29
RST1: C5.1 J8.5 R3.1 U4.29
RST2: C8.1 J12.5 R11.1 U6.29
RST3: C11.1 J16.5 R16.1 U8.29
RST4: C14.1 J20.5 R21.1 U10.29
RST5: C17.1 J24.5 R26.1 U12.29
RST6: C20.1 J28.5 R31.1 U14.29
RST7: C23.1 J32.5 R36.1 U16.29
RST8: C26.1 J36.5 R41.1 U18.29
RXI: JP2.4 U2.30
RXI1: JP1.4 U4.30
RXI2: JP7.4 U6.30
RXI3: JP10.4 U8.30
RXI4: JP13.4 U10.30
RXI5: JP16.4 U12.30
RXI6: JP19.4 U14.30
RXI7: JP22.4 U16.30
RXI8: JP25.4 U18.30
SCK: J5.3 R6.1 U2.17 U3.SCLK
SCK1: J8.3 R7.1 U1.SCLK U4.17
SCK2: J12.3 R12.1 U5.SCLK U6.17
SCK3: J16.3 R17.1 U7.SCLK U8.17
SCK4: J20.3 R22.1 U9.SCLK U10.17
SCK5: J24.3 R27.1 U11.SCLK U12.17
SCK6: J28.3 R32.1 U13.SCLK U14.17
SCK7: J32.3 R37.1 U15.SCLK U16.17
SCK8: J36.3 R42.1 U17.SCLK U18.17
SCL: J2.4 J3.4 J4.4 R4.1 U2.28
SCL1: J1.4 J6.4 J7.4 R9.1 U4.28
SCL2: J9.4 J10.4 J11.4 R14.1 U6.28
SCL3: J13.4 J14.4 J15.4 R19.1 U8.28
SCL4: J17.4 J18.4 J19.4 R24.1 U10.28
SCL5: J21.4 J22.4 J23.4 R29.1 U12.28
SCL6: J25.4 J26.4 J27.4 R34.1 U14.28
SCL7: J29.4 J30.4 J31.4 R39.1 U16.28
SCL8: J33.4 J34.4 J35.4 R44.1 U18.28
SDA: J2.3 J3.3 J4.3 R5.1 U2.27
SDA1: J1.3 J6.3 J7.3 R10.1 U4.27
SDA2: J9.3 J10.3 J11.3 R15.1 U6.27
SDA3: J13.3 J14.3 J15.3 R20.1 U8.27
SDA4: J17.3 J18.3 J19.3 R25.1 U10.27
SDA5: J21.3 J22.3 J23.3 R30.1 U12.27
SDA6: J25.3 J26.3 J27.3 R35.1 U14.27
SDA7: J29.3 J30.3 J31.3 R40.1 U16.27
SDA8: J33.3 J34.3 J35.3 R45.1 U18.27
TXO: JP2.5 U2.31
TXO1: JP1.5 U4.31
TXO2: JP7.5 U6.31
TXO3: JP10.5 U8.31
TXO4: JP13.5 U10.31
TXO5: JP16.5 U12.31
TXO6: JP19.5 U14.31
TXO7: JP22.5 U16.31
TXO8: JP25.5 U18.31